# EAGLE board eagle-test (EAGLE 9.6.2)
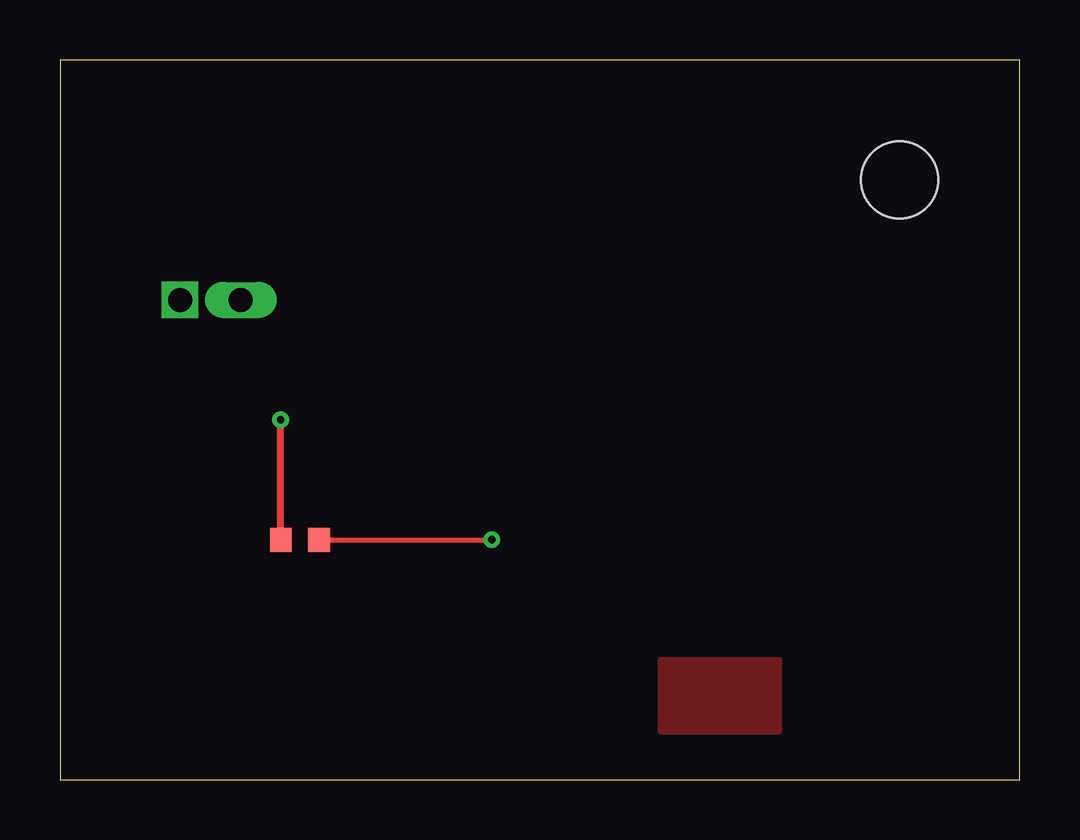
[diagram p0: board, top side]
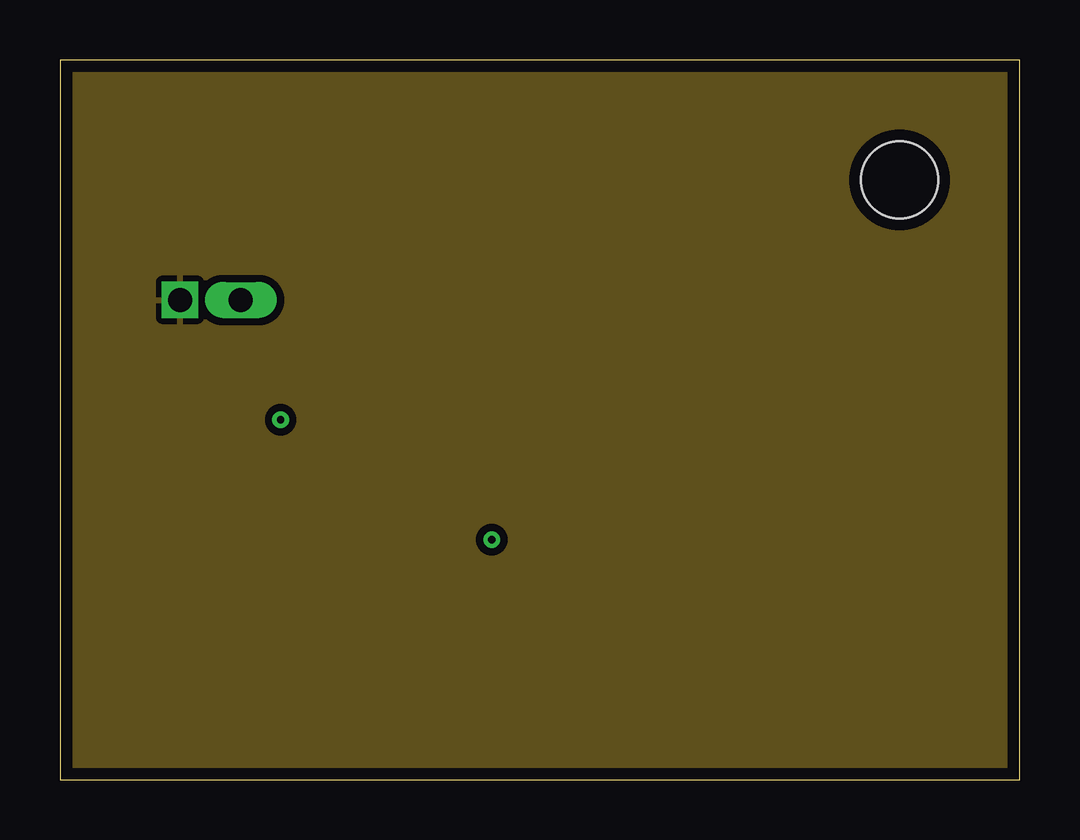
[diagram p1: board, inner layer Route15]
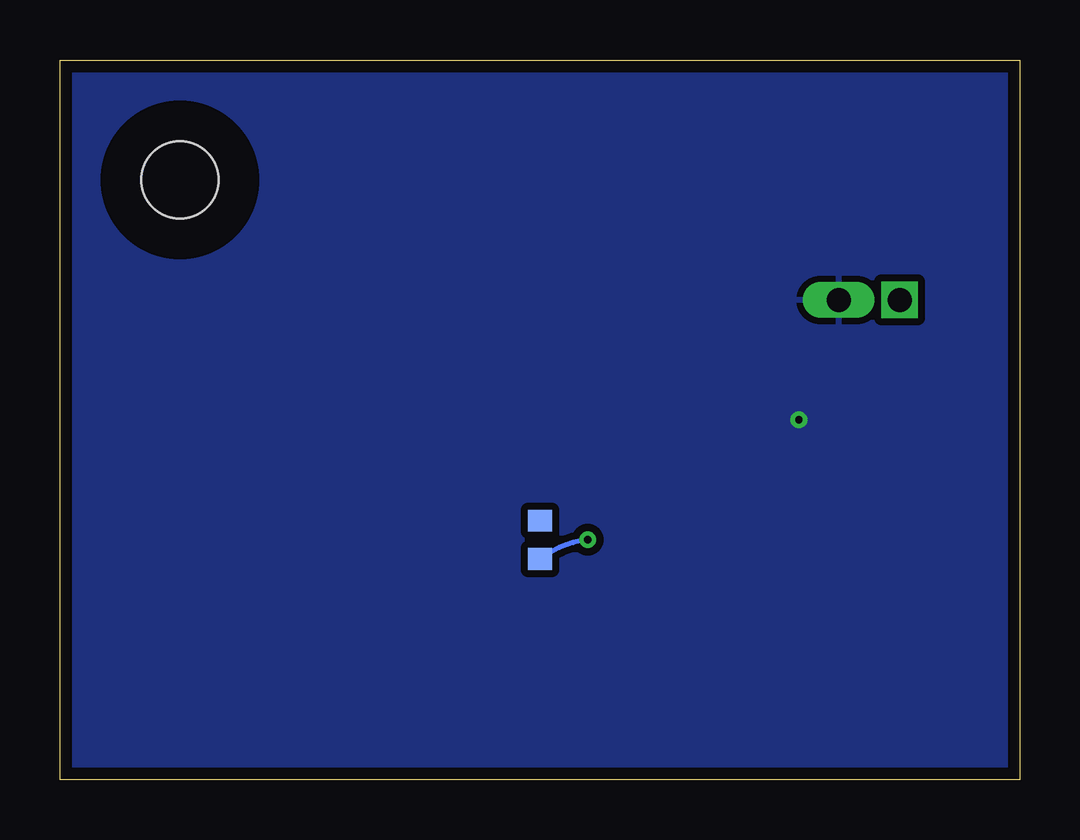
[diagram p2: board, bottom side, seen from below]

Size 40 x 30 mm. Coordinates in mm from the lower left corner, seen from the top.
Outline: 0,0 40,0 40,30 0,30 0,0
Copper layers (1+2*15+16): Top / $GND / Route15 / Bottom
Design rules "test": track to track 0.2mm, copper to edge 0.5mm, minimum pad ring 10mil, minimum via ring 8mil

## Footprints (pad centres in the part's own frame; a part is rotated, then mirrored left to right if it is on the bottom)
MH = hole 3.2: 0,0
HDR2 = drill 1 square: 1 0,0 | drill 1 long: 2 2.54,0
R0603 = smd 0.9 x 1: 1 -0.8,0; 2 0.8,0

## Placement (x,y rotation side)
H1  [MH]  35,25 0 top
J1  PWR  [HDR2]  5,20 0 top
R1  33R  [R0603]  10,10 0 top
R2  0R  [R0603]  20,10 90 bottom

## Library data of the parts
H1 J1 R1 R2 = test

## Nets
CLK: R1.2 R2.1
GND: J1.2 R1.1
VCC: J1.1

## Tracks (layer width: path | path; a pad name or v marks a point on that pad's centre or on a via)
CLK  (via drill 0.3)
  Top 0.2: R1.2 v18,10
  Bottom 0.2: v18,10 arc-30 R2.1
GND  (via drill 0.3)
  Top 0.3: R1.1 v9.2,15
  pour Bottom (isolate 0.3): 0,0 40,0 40,30 0,30
  pour Top (isolate 0.3): 25,2 30,2 30,5 25,5
VCC
  pour Route15 (isolate 0.3): 0,0 40,0 40,30 0,30